# EAGLE board ESP12_Harness (EAGLE 8.0.0)
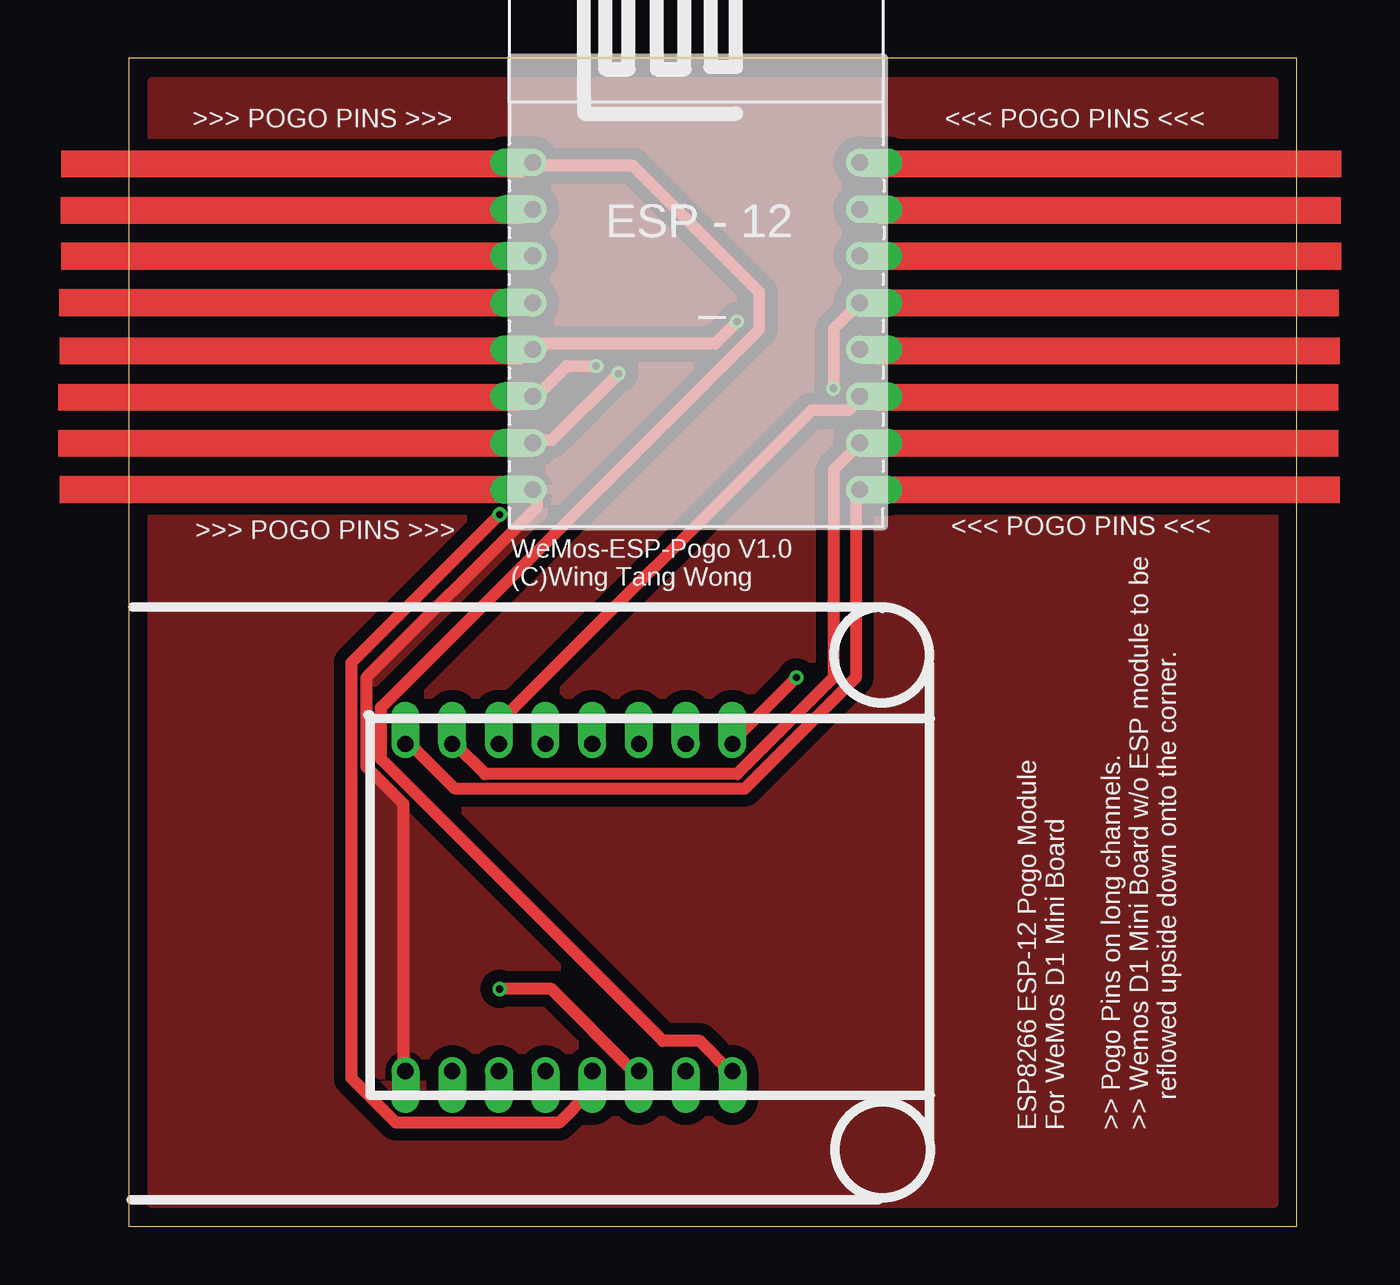
[diagram p0: board, top side]
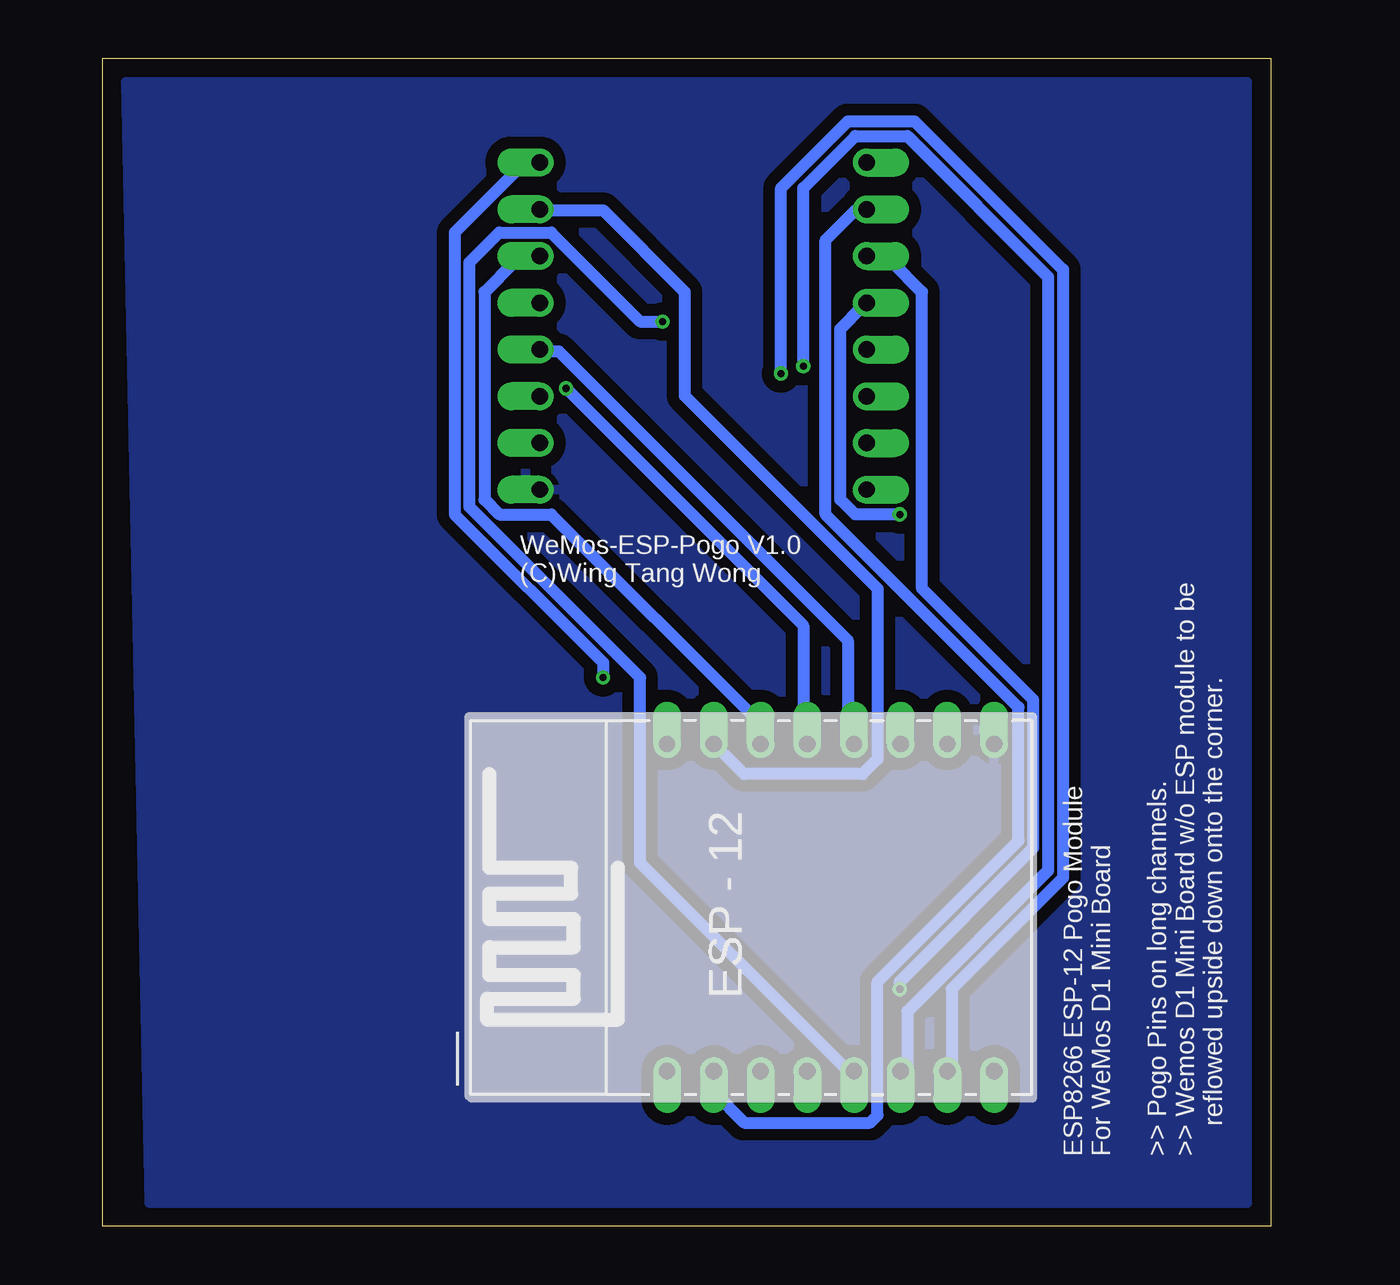
[diagram p1: board, bottom side, seen from below]

Size 50 x 50 mm. Coordinates in mm from the lower left corner, seen from the top.
Outline: 0,0 50,0 50,50 0,50
Outline: 0,50 0,0
Outline: 0,50 0,0
Copper layers (1*16): Top 0.035mm / dielectric 1.5mm / Bottom 0.035mm
Design rules "dirt_cheap_dirty_boards.v1 *": minimum track width 20mil, minimum drill 12mil, track to track 5mil, track to pad 5mil, pad to pad 5mil, via to via 5mil, smd to smd 0mil, copper to edge 10mil, drill to drill 10mil, minimum pad ring 10mil, minimum via ring 6mil, stop-mask expansion 2mil, vias tented up to drill 25mil, thermal gap 10mil

## Footprints (pad centres in the part's own frame; a part is rotated, then mirrored left to right if it is on the bottom)
ESP12 = drill 0.7 offset: ADC -7.1,3.8; CH_PD -7.1,1.8; GND 6.9,-8.2; GPIO0 6.9,-2.2; GPIO2 6.9,-4.2; GPIO4 6.9,1.8; GPIO5 6.9,-0.2; GPIO12 -7.1,-4.2; GPIO13 -7.1,-6.2; GPIO14 -7.1,-2.2; GPIO15 6.9,-6.2; GPIO16 -7.1,-0.2; RESET -7.1,5.8; RX 6.9,3.8; TX 6.9,5.8; VCC -7.1,-8.2

## Placement (x,y rotation side)
_  [ESP12]  24.39,39.74 0 top
__  [ESP12]  20.04,13.75 90 bottom

## Library data of the parts
_ __ = esp8266modules

## Nets
GND: _.GND __.GND
N$2: _.GPIO13 __.GPIO13
N$3: _.GPIO12 __.GPIO12
N$4: _.GPIO14 __.GPIO14
N$5: _.GPIO16 __.GPIO16
N$6: _.CH_PD __.CH_PD
N$7: _.ADC __.ADC
N$8: _.RESET __.RESET
N$10: _.GPIO15 __.GPIO15
N$11: _.GPIO2 __.GPIO2
N$12: _.GPIO0 __.GPIO0
N$13: _.GPIO5 __.GPIO5
N$14: _.GPIO4 __.GPIO4
N$15: _.RX __.RX
N$16: _.TX __.TX
VCC: _.VCC __.VCC

## Tracks (layer width: path | path; a pad name or v marks a point on that pad's centre or on a via)
GND
  Top 0.508: __.GND 12.06,20.64 13.97,18.73 26.35,18.73 31.11,23.5 31.11,31.43 _.GND
  pour Bottom (isolate 0.508): 48,1 1,1 1,49 49,49
N$2  (via drill 0.3)
  Top 0.508: v20.95,36.51 18.1,33.66 17.46,33.66 _.GPIO13
  Bottom 0.508: v20.95,36.51 20.95,44.45 18.1,47.31 15.24,47.31 8.89,40.96 8.89,14.92 13.65,10.16 13.65,6.67 __.GPIO13
N$3  (via drill 0.3)
  Top 0.508: v20,36.83 18.73,36.83 17.46,35.56 _.GPIO12
  Bottom 0.508: v20,36.83 20,44.45 17.78,46.67 15.56,46.67 9.53,40.64 9.53,15.24 15.56,9.21 15.56,6.67 __.GPIO12
N$4  (via drill 0.3)
  Top 0.508: v26.04,38.73 25.08,37.78 17.46,37.78 _.GPIO14
  Bottom 0.508: v26.04,38.73 26.99,38.73 30.8,42.55 33.02,42.55 34.29,41.27 34.29,30.8 26.99,23.5 26.99,15.56 18.1,6.67 __.GPIO14
N$5  (via drill 0.3)
  Top 0.508: v15.88,30.48 9.53,24.13 9.53,6.35 11.43,4.45 18.41,4.45 19.68,5.71 19.68,6.35 __.GPIO16
  Bottom 0.508: v15.88,30.48 17.78,30.48 18.41,31.11 18.41,38.42 17.46,39.37 _.GPIO16
N$6  (via drill 0.3)
  Top 0.508: v15.88,10.16 18.1,10.16 21.59,6.67 __.CH_PD
  Bottom 0.508: v15.88,10.16 15.88,10.48 10.16,16.19 10.16,22.54 14.92,27.3 14.92,40.01 16.19,41.27 17.14,41.27 _.CH_PD
N$7
  Bottom 0.508: _.ADC 17.46,43.5 17.78,43.5 19.05,42.23 19.05,30.48 10.79,22.23 10.79,16.51 16.83,10.48 16.83,4.76 17.14,4.45 22.54,4.45 23.81,5.71 23.81,6.35 __.ADC
N$8
  Top 0.508: _.RESET 17.46,45.4 21.59,45.4 26.99,40.01 26.99,38.42 10.79,22.23 10.79,20 22.86,7.94 24.45,7.94 25.72,6.67 __.RESET
N$10
  Top 0.508: __.GPIO15 13.97,20.64 15.24,19.37 26.04,19.37 30.16,23.5 30.16,32.38 31.11,33.34 _.GPIO15
N$11
  Top 0.508: __.GPIO2 15.88,20.95 15.88,21.59 29.21,34.92 30.8,34.92 31.11,35.24 _.GPIO2
N$12
  Bottom 0.508: __.GPIO0 18.1,20.95 18.1,25.08 30.48,37.47 31.11,37.47 _.GPIO0
N$13  (via drill 0.3)
  Top 0.508: v30.16,35.88 30.16,38.42 31.11,39.37 _.GPIO5
  Bottom 0.508: v30.16,35.88 20,25.72 20,20.95 __.GPIO5
N$14
  Bottom 0.508: __.GPIO4 21.91,20.95 21.91,21.59 30.8,30.48 33.02,30.48 33.66,31.11 33.66,40.01 32.38,41.27 31.43,41.27 _.GPIO4
N$15
  Bottom 0.508: __.RX 23.81,20.64 22.54,19.37 17.46,19.37 16.83,20 16.83,27.3 25.08,35.56 25.08,40.01 28.57,43.5 31.11,43.5 _.RX
N$16  (via drill 0.3)
  Top 0.508: v28.57,23.5 26.04,20.95 __.TX
  Bottom 0.508: v28.57,23.5 28.57,24.13 34.92,30.48 34.92,42.55 32.07,45.4 31.43,45.4 _.TX
VCC
  Top 0.508: __.VCC 11.75,6.67 11.75,18.1 10.16,19.68 10.16,23.5 17.46,30.8 17.46,31.43 _.VCC
  pour Top (isolate 0.508): 1,1 1,49 49,49 49,1
(copper drawn outside any net)
  shapes: Top area x16

## Text on the board
tPlace: WeMos-ESP-Pogo V1.0 / (C)Wing Tang Wong
bPlace: WeMos-ESP-Pogo V1.0 / (C)Wing Tang Wong
tNames: >>> POGO PINS >>> | <<< POGO PINS <<< | <<< POGO PINS <<< | >>> POGO PINS >>> | ESP8266 ESP-12 Pogo Module / For WeMos D1 Mini Board / / >> Pogo Pins on long channels. / >> Wemos D1 Mini Board w/o ESP module to be / reflowed upside down onto the corner.
bNames: ESP8266 ESP-12 Pogo Module / For WeMos D1 Mini Board / / >> Pogo Pins on long channels. / >> Wemos D1 Mini Board w/o ESP module to be / reflowed upside down onto the corner.